# EAGLE board untitled (EAGLE 7.2.0)
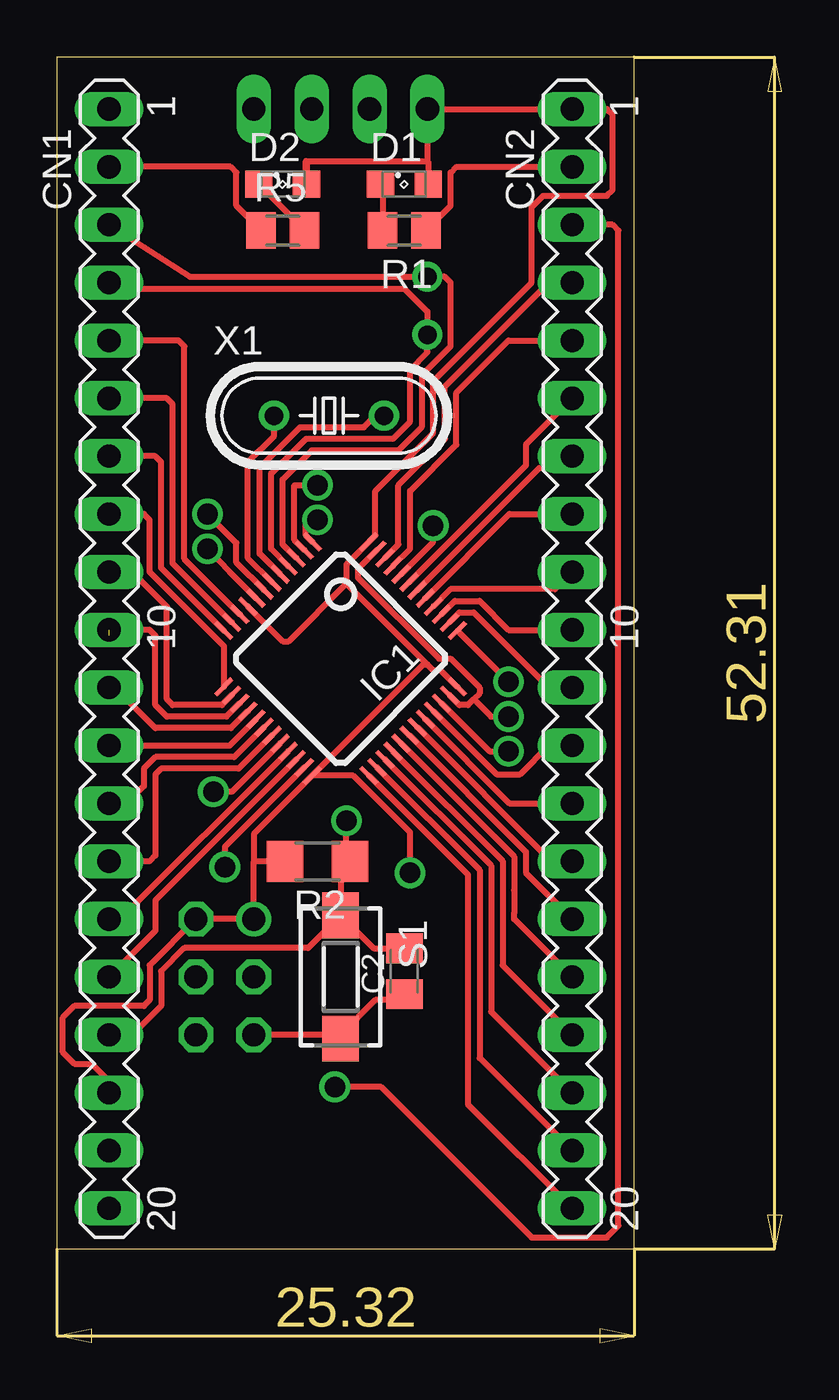
[diagram p0: board, top side]
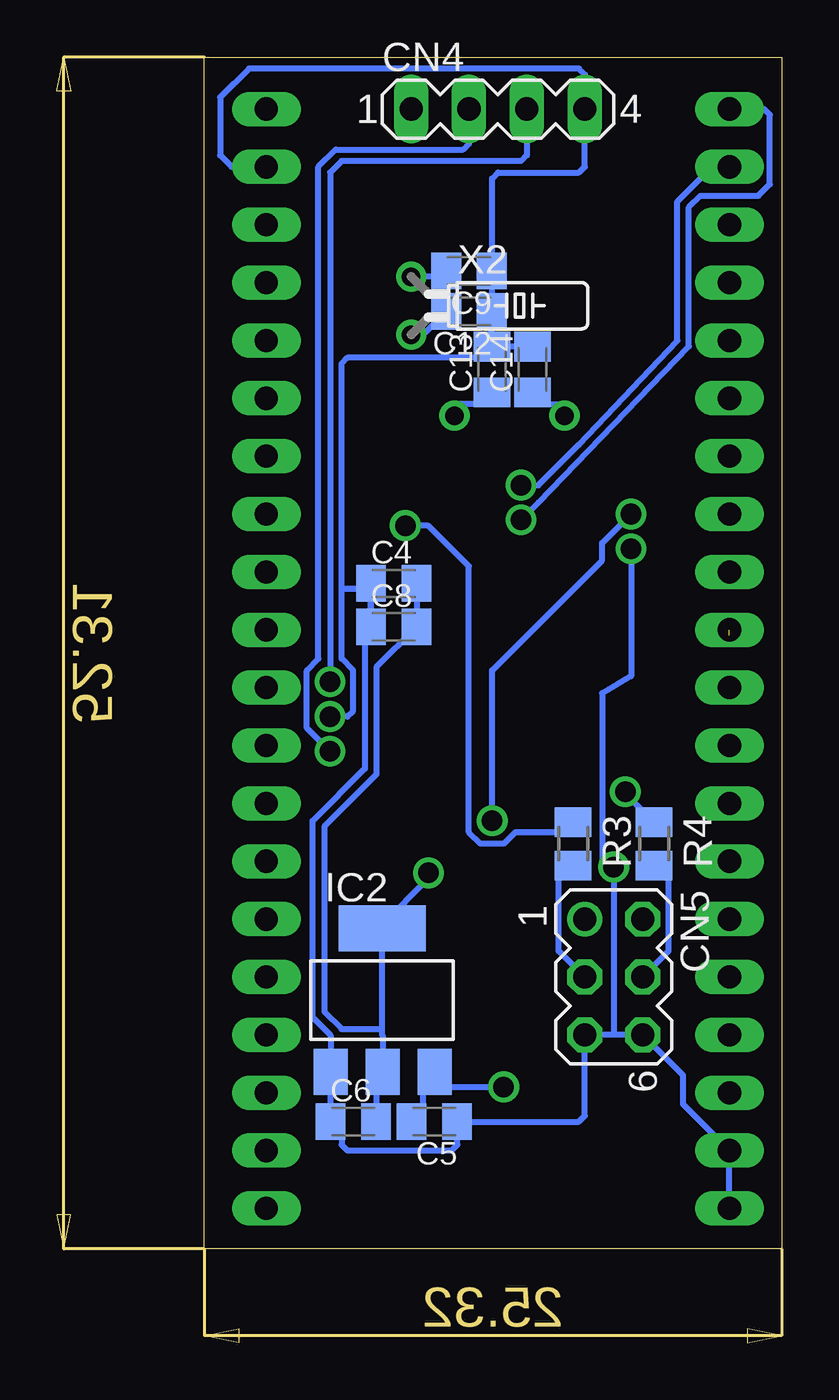
[diagram p1: board, bottom side, seen from below]

Size 25.32 x 52.31 mm. Coordinates in mm from the lower left corner, seen from the top.
Outline: 0,0 25.32,0 25.32,52.31 0,52.31 0,0
Copper layers (1*16): Top 0.035mm / dielectric 1.5mm / Bottom 0.035mm
Design rules "default": minimum track width 10mil, minimum drill 24mil, track to track 8mil, track to pad 8mil, pad to pad 8mil, via to via 8mil, smd to smd 8mil, copper to edge 40mil, drill to drill 8mil, minimum pad ring 10mil, minimum via ring 8mil, stop-mask expansion 4mil, vias tented up to drill 0mil, thermal gap 10mil

## Footprints (pad centres in the part's own frame; a part is rotated, then mirrored left to right if it is on the bottom)
C0805K = smd 1.3 x 1.6: 1 -1,0; 2 1,0
MA20-1L = drill 1.016 long: 1 24.13,0; 2 21.59,0; 3 19.05,0; 4 16.51,0; 5 13.97,0; 6 11.43,0; 7 8.89,0; 8 6.35,0; 9 3.81,0; 10 1.27,0; 11 -1.27,0; 12 -3.81,0; 13 -6.35,0; 14 -8.89,0; 15 -11.43,0; 16 -13.97,0; 17 -16.51,0; 18 -19.05,0; 19 -21.59,0; 20 -24.13,0
MA04-1 = drill 1.016 long: 1 -3.81,0; 2 -1.27,0; 3 1.27,0; 4 3.81,0
MA03-2 = drill 1.016: 1 -2.54,-1.27 | drill 1.016 octagon: 2 -2.54,1.27; 3 0,-1.27; 4 0,1.27; 5 2.54,-1.27; 6 2.54,1.27
SML0805 = smd 1.2 x 1.2: A 1.05,0; C -1.05,0
TQFP48 = smd 0.2 x 1: 1 -2.75,-4.5; 2 -2.25,-4.5; 3 -1.75,-4.5; 4 -1.25,-4.5; 5 -0.75,-4.5; 6 -0.25,-4.5; 7 0.25,-4.5; 8 0.75,-4.5; 9 1.25,-4.5; 10 1.75,-4.5; 11 2.25,-4.5; 12 2.75,-4.5; 25 2.75,4.5; 26 2.25,4.5; 27 1.75,4.5; 28 1.25,4.5; 29 0.75,4.5; 30 0.25,4.5; 31 -0.25,4.5; 32 -0.75,4.5; 33 -1.25,4.5; 34 -1.75,4.5; 35 -2.25,4.5; 36 -2.75,4.5 | smd 1 x 0.2: 13 4.5,-2.75; 14 4.5,-2.25; 15 4.5,-1.75; 16 4.5,-1.25; 17 4.5,-0.75; 18 4.5,-0.25; 19 4.5,0.25; 20 4.5,0.75; 21 4.5,1.25; 22 4.5,1.75; 23 4.5,2.25; 24 4.5,2.75; 37 -4.5,2.75; 38 -4.5,2.25; 39 -4.5,1.75; 40 -4.5,1.25; 41 -4.5,0.75; 42 -4.5,0.25; 43 -4.5,-0.25; 44 -4.5,-0.75; 45 -4.5,-1.25; 46 -4.5,-1.75; 47 -4.5,-2.25; 48 -4.5,-2.75
SOT223 = smd 1.499 x 2.007: 1 -2.261,-3.15; 2 0.025,-3.15; 3 2.311,-3.15 | smd 3.81 x 2.007: 4 0,3.15
M0805 = smd 1.3 x 1.6: 1 -0.95,0; 2 0.95,0
R1206 = smd 1.6 x 1.803: 1 -1.422,0; 2 1.422,0
DTSM-3 = smd 2 x 1.6: 1 -2.7,0; 2 2.7,0
HC49/S = drill 0.813: 1 -2.413,0; 2 2.413,0
TC26H = drill 0.813: 1 -1.27,0; 2 1.27,0

## Placement (x,y rotation side)
C2  100n  [C0805K]  15.24,12.19 90 top
C4  100n  [C0805K]  17.02,29.21 0 bottom
C5  10u  [C0805K]  15.24,5.59 180 bottom
C6  10u  [C0805K]  18.8,5.59 0 bottom
C8  100n  [C0805K]  17.02,27.3 0 bottom
C9  100p  [C0805K]  13.72,42.93 180 bottom
C12  100p  [C0805K]  13.72,41.15 180 bottom
C13  12p  [C0805K]  12.7,38.61 90 bottom
C14  12p  [C0805K]  10.92,38.61 90 bottom
CN1  [MA20-1L]  2.29,25.91 90 top
CN2  [MA20-1L]  22.61,25.91 90 top
CN4  [MA04-1]  12.45,50.04 0 bottom
CN5  [MA03-2]  7.37,11.94 270 bottom
D1  red  [SML0805]  15.24,46.74 0 top
D2  blue  [SML0805]  9.91,46.74 0 top
IC1  STM32F10XCXT6  [TQFP48]  12.45,25.91 225 top
IC2  REG1117  [SOT223]  17.53,10.92 0 bottom
R1  510  [M0805]  15.24,44.7 180 top
R2  10k  [R1206]  11.43,17.02 180 top
R3  100k  [M0805]  9.14,17.78 270 bottom
R4  100k  [M0805]  5.59,17.78 270 bottom
R5  510  [M0805]  9.91,44.7 0 top
S1  DTSM-3  [DTSM-3]  12.45,11.94 270 top
X1  8M  [HC49/S]  11.94,36.58 0 top
X2  32k768  [TC26H]  16.26,41.4 270 bottom

## Library data of the parts
C2 C4-C6 C8 C9 C12-C14 R1-R5 = resistor
CN1 CN2 CN4 CN5 = con-lstb; OC_FARNELL: unknown; OC_NEWARK: unknown
D1 D2 = led
IC1 = stm32
IC2 = burr-brown; MPN: REG1117; OC_FARNELL: 1097566; OC_NEWARK: 14P6981
S1 = switch-tact
X1 = crystal; OC_FARNELL: 1667008; OC_NEWARK: unknown
X2 = crystal; OC_FARNELL: unknown; OC_NEWARK: unknown

## Nets
3VB: CN1.1 IC1.1
+3V3: C4.2 C6.2 C8.2 CN1.18 CN2.1 CN4.1 CN5.1 CN5.2 D1.A D2.A IC1.9 IC1.24 IC1.36 IC1.48 IC2.2 R2.2
+5V: C5.2 CN2.3 IC2.3
A0: CN1.5 IC1.10
A1: CN1.6 IC1.11
A2: CN1.7 IC1.12
A3: CN1.8 IC1.13
A4: CN1.9 IC1.14
A5: CN1.10 IC1.15
A6: CN1.11 IC1.16
A7: CN1.12 IC1.17
A8: CN2.16 IC1.29
A9: CN2.15 IC1.30
A10: CN2.14 IC1.31
A11: CN2.13 IC1.32
A12: CN2.12 IC1.33
A15: CN2.11 IC1.38
B0: CN1.13 IC1.18
B1: CN1.14 IC1.19
B3: CN2.10 IC1.39
B4: CN2.9 IC1.40
B5: CN2.8 IC1.41
B6: CN2.7 IC1.42
B7: CN2.6 IC1.43
B8: CN2.5 IC1.45
B9: CN2.4 IC1.46
B10: CN1.15 IC1.21
B11: CN1.16 IC1.22
B12: CN2.20 IC1.25
B13: CN2.19 IC1.26
B14: CN2.18 IC1.27
B15: CN2.17 IC1.28
BOOT0: CN5.3 R3.2
BOOT1: CN5.4 R4.2
C13: CN1.2 IC1.2 R5.1
C14: C9.2 CN1.3 IC1.3 X2.1
C15: C12.2 CN1.4 IC1.4 X2.2
DCLK: CN4.3 IC1.37
DIO: CN4.2 IC1.34
GND: C2.1 C4.1 C5.1 C6.1 C8.1 C9.1 C12.1 C13.2 C14.2 CN1.19 CN1.20 CN2.2 CN4.4 CN5.5 CN5.6 IC1.8 IC1.23 IC1.35 IC1.47 IC2.1 R1.1 S1.2
N$1: C13.1 IC1.5 X1.2
N$2: C14.1 IC1.6 X1.1
N$3: IC1.44 R3.1
N$4: IC1.20 R4.1
N$5: D1.C R1.2
N$6: D2.C R5.2
R: C2.2 CN1.17 IC1.7 R2.1 S1.1

## Tracks (layer width: path | path; a pad name or v marks a point on that pad's centre or on a via)
3VB  (via drill 0.9)
  Top 0.254: IC1.1 10.92,31.32 10.92,32 v11.43,32
  Bottom 0.254: v11.43,32 10.67,32.77 4.06,39.62 4.06,45.72 3.56,46.23 1.02,46.23 0.51,46.74 0.51,49.78 0.76,50.04 CN1.1
+3V3  (via drill 0.9)
  Top 0.254: IC1.24 8.64,18.21 8.64,17.02 | R2.2 8.64,17.02 | CN1.18 2.29,7.37 1.52,8.13 0.76,8.13 0.25,8.64 0.25,10.16 0.76,10.67 3.81,10.67 4.06,10.92 4.06,12.45 CN5.2 CN5.1 8.64,17.02 | 10.92,47.75 10.96,47.72 D2.A 10.92,46.77 10.92,47.75 | 10.92,47.75 16.26,47.75 | 16.26,47.75 16.29,47.72 D1.A | 16.26,47.75 CN4.1 CN2.1 24.13,50.04 24.38,49.78 24.38,46.48 24.13,46.23 21.34,46.23 20.83,45.72 20.83,42.42 16.51,38.1 16.51,35.81 13.97,33.27 13.97,31.32 IC1.48 12.7,30.05 12.7,29.21 | 12.7,29.21 16.26,25.65 | 12.7,29.21 10.16,26.67 9.92,26.67 IC1.9 | IC1.24 16.08,25.65 16.26,25.65 | IC1.36 16.84,25.4 16.51,25.4 16.26,25.65 | v15.49,16.51 15.49,18.29 13,20.78 IC1.24
  Bottom 0.254: C6.2 17.8,7.48 IC2.2 17.5,9.37 17.53,9.4 17.53,9.65 | C4.2 C8.2 17.78,25.54 17.78,20.83 20.07,18.54 20.07,10.41 19.3,9.65 17.53,9.65 | 17.53,9.65 17.53,14.22 15.49,16.26 v15.49,16.51
+5V  (via drill 0.9)
  Top 0.254: CN2.3 24.38,44.96 24.64,44.7 24.64,1.02 24.13,0.51 20.83,0.51 14.22,7.11 v12.19,7.11
  Bottom 0.254: C5.2 16,5.59 15.75,5.84 15.75,7.24 IC2.3 14.55,7.11 v12.19,7.11
A0
  Top 0.254: IC1.10 5.59,30.29 5.59,39.62 5.33,39.88 CN1.5
A1
  Top 0.254: IC1.11 5.08,30.09 5.08,37.08 4.83,37.34 CN1.6
A2
  Top 0.254: IC1.12 4.57,29.89 4.57,34.54 4.32,34.8 CN1.7
A3
  Top 0.254: IC1.13 7.32,26.46 4.06,29.72 4.06,32 3.81,32.26 CN1.8
A4
  Top 0.254: IC1.14 7.23,23.88 5.08,23.88 4.83,24.13 4.83,28.19 3.3,29.72 CN1.9
A5  (1 unrouted)
  Top 0.254: IC1.15 7.43,23.37 4.83,23.37 4.32,23.88 4.32,26.92 4.06,27.18 CN1.10
A6
  Top 0.254: IC1.16 7.63,22.86 4.32,22.86 2.54,24.64 CN1.11
A7
  Top 0.254: CN1.12 7.58,22.1 IC1.17
A8
  Top 0.254: IC1.29 20.07,17.23 20.07,15.75 20.07,14.73 20.07,14.48 CN2.16
A9
  Top 0.254: IC1.30 20.57,17.43 20.57,16.51 CN2.15
A10
  Top 0.254: IC1.31 21.69,17.02 CN2.14
A11
  Top 0.254: IC1.32 19.86,19.56 CN2.13
A12
  Top 0.254: IC1.33 19.29,20.83 20.32,20.83 21.59,22.1 CN2.12
A15
  Top 0.254: IC1.38 17.66,27.94 18.29,27.94 21.59,24.64 CN2.11
B0
  Top 0.254: IC1.18 7.77,21.59 4.32,21.59 3.81,21.08 3.81,20.32 3.05,19.56 CN1.13
B1
  Top 0.254: IC1.19 7.97,21.08 4.57,21.08 4.32,20.83 4.32,17.27 4.06,17.02 CN1.14
B3
  Top 0.254: IC1.39 17.46,28.45 18.54,28.45 19.81,27.18 CN2.10
B4
  Top 0.254: IC1.40 17.26,28.96 21.84,28.96 CN2.9
B5
  Top 0.254: IC1.41 19.86,32.26 CN2.8
B6
  Top 0.254: CN2.7 22.1,34.29 21.18,34.29 IC1.42
B7
  Top 0.254: IC1.43 20.57,34.39 20.57,35.31 CN2.6
B8
  Top 0.254: IC1.45 15.49,30.72 15.49,33.27 17.53,35.31 17.53,37.59 19.81,39.88 CN2.5
B9
  Top 0.254: IC1.46 14.99,30.92 14.99,33.53 17.02,35.56 17.02,37.85 21.59,42.42 CN2.4
B10
  Top 0.254: IC1.21 2.78,14.48 CN1.15
B11
  Top 0.254: IC1.22 4.32,15.3 4.32,13.97 CN1.16
B12
  Top 0.254: IC1.25 18.03,16.43 18.03,6.35 CN2.20
B13
  Top 0.254: IC1.26 18.54,16.63 18.54,8.38 CN2.19
B14
  Top 0.254: IC1.27 19.05,16.83 19.05,10.41 CN2.18
B15
  Top 0.254: IC1.28 19.56,17.03 19.56,12.45 CN2.17
BOOT0
  Bottom 0.254: CN5.3 9.78,13.08 9.78,16.76 9.71,16.83 R3.2
BOOT1
  Bottom 0.254: CN5.4 4.95,13.08 4.95,16.76 5.02,16.83 R4.2
C13  (via drill 0.9)
  Top 0.254: IC1.2 10.41,31.12 10.41,33.53 v11.43,33.53 | R5.1 7.87,45.79 7.87,47.24 7.62,47.5 CN1.2
  Bottom 0.254: v11.43,33.53 10.67,33.53 8.89,35.31 4.57,39.88 4.57,45.97 3.05,47.5 CN1.2
C14
  Top 0.254: IC1.3 9.91,30.92 9.91,33.78 11.18,35.05 14.99,35.05 16,36.07 16,38.35 17.27,39.62 17.27,42.42 17.02,42.67 X2.1 5.84,42.67 CN1.3
  Bottom 0.254: C9.2 14.97,42.67 X2.1
C15
  Top 0.254: IC1.4 9.4,30.73 9.4,34.04 10.92,35.56 14.73,35.56 15.49,36.32 15.49,38.61 16.26,39.37 X2.2 16.26,41.15 15.24,42.16 2.54,42.16 CN1.4
  Bottom 0.254: C12.2 15.73,40.13 X2.2
DCLK  (via drill 0.9)
  Top 0.254: IC1.37 19.81,24.91 v19.81,24.89
  Bottom 0.254: CN4.3 11.18,48.01 11.43,47.75 19.3,47.75 19.81,47.24 v19.81,24.89
DIO  (via drill 0.9)
  Top 0.254: IC1.34 18.98,21.84 v19.81,21.84
  Bottom 0.254: v19.81,21.84 20.83,22.86 20.83,25.4 20.32,25.91 20.32,47.5 19.56,48.26 13.97,48.26 13.72,48.51 CN4.2
GND  (via drill 0.9)
  Top 0.254: IC1.23 7.37,17.65 v7.37,16.76 | C2.1 14.97,10.92 13.97,10.92 12.45,9.4 S1.2 12.29,9.4 CN5.5 | R1.1 17.27,45.79 17.27,47.24 17.53,47.5 CN2.2 | IC1.47 13.21,29.85 13.21,29.46 16.76,25.91 17.27,25.91 18.54,24.64 18.54,24.38 18.29,24.13 | IC1.35 17.66,23.88 18.03,23.88 18.29,24.13 | IC1.8 7.58,29.72 v6.6,30.73 | 18.29,24.13 19.05,23.37 v19.81,23.37
  Bottom 0.254: CN1.20 CN1.19 4.32,6.35 4.32,7.62 CN5.6 7.37,9.4 | 7.37,9.4 CN5.5 8.64,5.84 8.89,5.59 C5.1 14.24,4.59 14.22,4.57 14.48,4.32 19.05,4.32 19.3,4.57 19.3,5.1 C6.1 IC2.1 19.79,9.37 20.57,10.16 20.57,18.8 18.29,21.08 18.29,27.04 18.03,27.29 | 7.37,9.4 v7.37,16.76 7.62,17.02 7.87,17.02 7.87,24.38 6.6,25.15 v6.6,30.73 | CN2.2 24.13,47.5 24.64,48.01 24.64,50.55 23.37,51.82 8.89,51.82 8.64,51.56 CN4.4 8.64,47.5 8.89,47.24 12.45,47.24 12.7,46.99 12.7,41.16 C12.1 | C9.1 C12.1 | C14.2 C13.2 | C13.2 12.7,39.62 12.72,39.64 C12.1 | 19.3,28.96 19.3,25.91 18.8,25.4 18.8,23.62 19.05,23.37 v19.81,23.37 | 19.3,28.96 19.3,38.86 19.05,39.12 13.19,39.12 C13.2 | C4.1 C8.1 18.03,27.29 | 18.03,27.29 18.03,29.21 18.29,28.96 19.3,28.96
N$1
  Top 0.254: IC1.5 8.89,30.53 8.89,34.29 10.67,36.07 13.46,36.07 13.97,36.58 X1.2
  Bottom 0.254: C13.1 13.22,37.08 14.22,37.08 14.35,36.96 X1.2
N$2
  Top 0.254: IC1.6 8.38,30.33 8.38,34.54 9.53,35.69 X1.1
  Bottom 0.254: C14.1 10.4,37.08 9.65,37.08 9.53,36.96 X1.1
N$3  (via drill 0.9)
  Top 0.254: IC1.44 16.51,31.03 v16.51,31.75
  Bottom 0.254: 8.64,19.24 R3.1 9.59,18.29 11.68,18.29 12.19,17.78 13.21,17.78 13.72,18.29 13.72,29.97 15.49,31.75 v16.51,31.75
N$4  (via drill 0.9)
  Top 0.254: IC1.20 7.66,20.07 v6.86,20.07
  Bottom 0.254: R4.1 6.86,20 v6.86,20.07
N$5
  Top 0.254: D1.C 14.29,46.64 R1.2
N$6
  Top 0.254: D2.C 10.86,44.74 R5.2
N$8  (via drill 0.9)
  other vias: 19.81,24.89
N$9  (via drill 0.9)
  other vias: 15.49,16.51
R  (via drill 0.9)
  Top 0.254: S1.1 12.45,16.61 R2.1 12.7,17.02 12.45,17.27 12.7,17.53 v12.7,18.8 | S1.1 13.89,13.19 C2.2 | S1.1 11.02,13.21 5.59,13.21 4.57,12.19 4.57,10.67 3.3,9.4 CN1.17 | IC1.7 7.87,30.13 7.87,30.99 v6.6,32.26
  Bottom 0.254: v12.7,18.8 12.7,25.4 7.87,30.23 7.87,30.99 v6.6,32.26